# Altium PCB PCB2.PcbDoc
Units mm, origin at the board's own origin, x right, y up, seen from the top; angles counter-clockwise.
Board outline 98.69 x 51.22 mm, 2 copper layers (Top Layer, Bottom Layer); 19 components, 17 nets, 60 pads, 0 vias.
Unrouted connection lines stored in the file: 7.
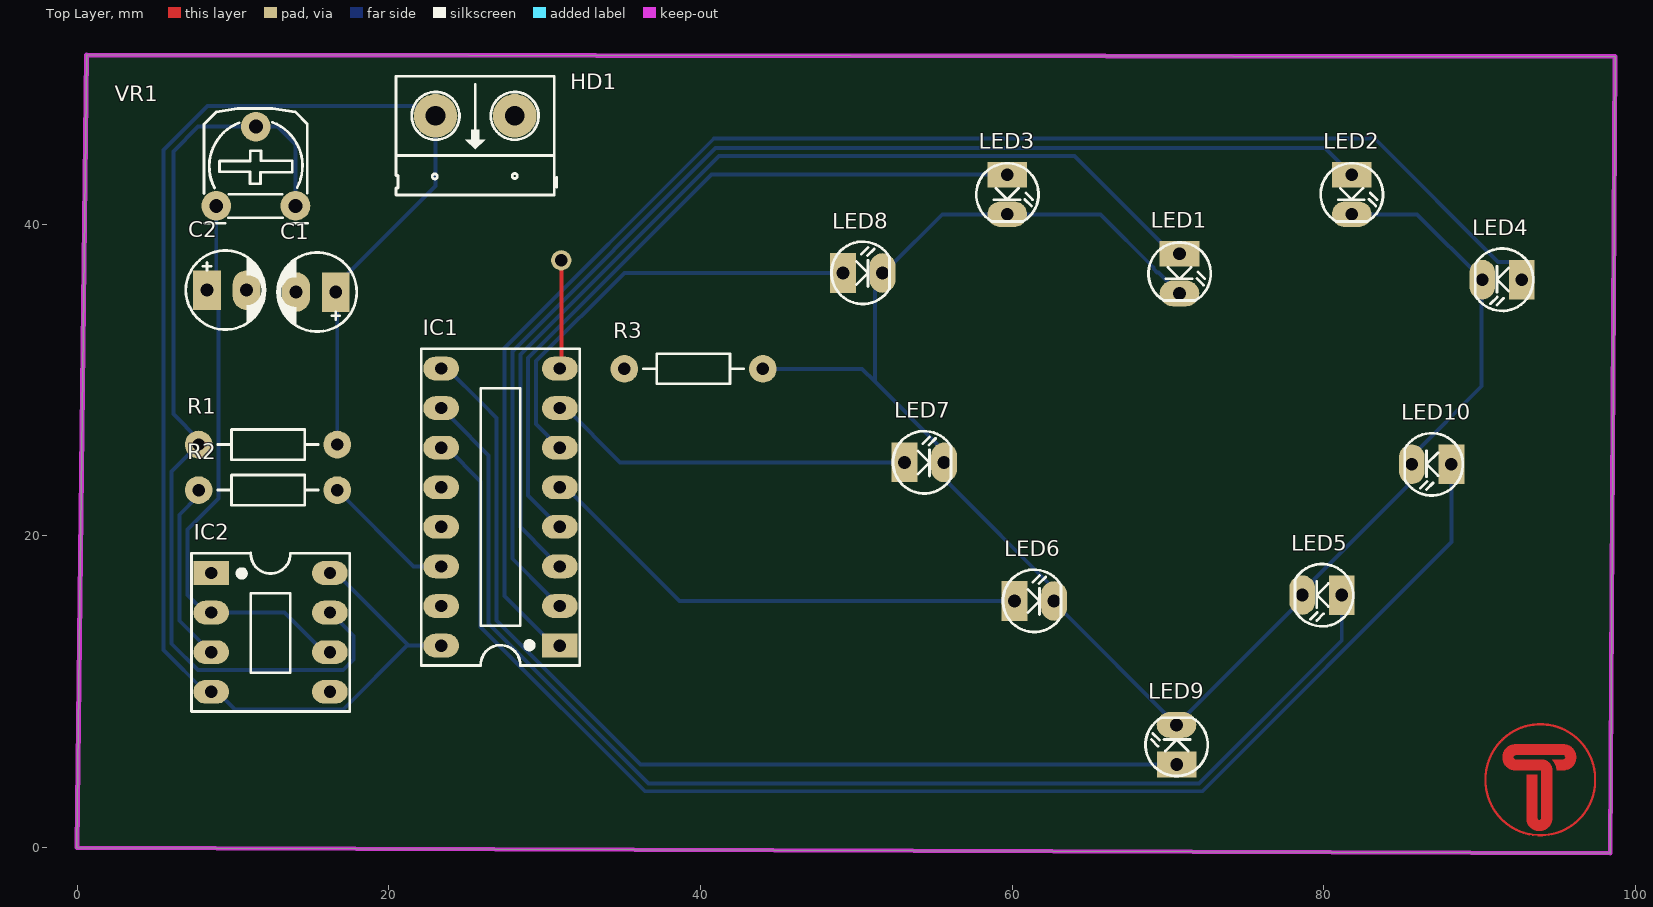
[diagram p0: Top Layer view]
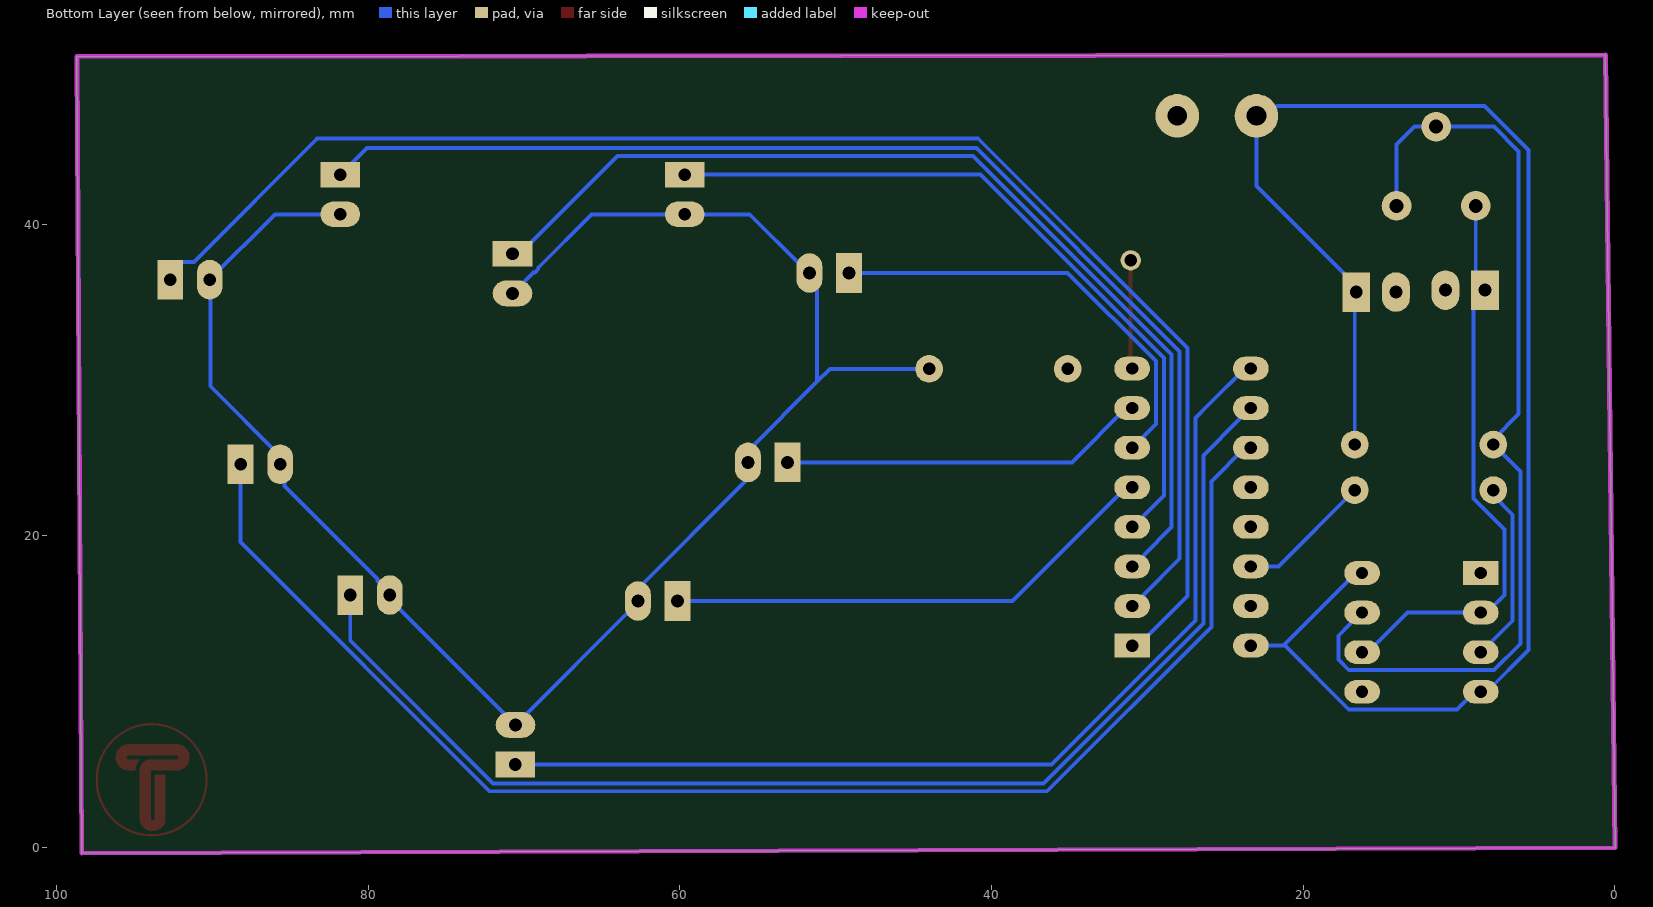
[diagram p1: Bottom Layer view, seen from below]
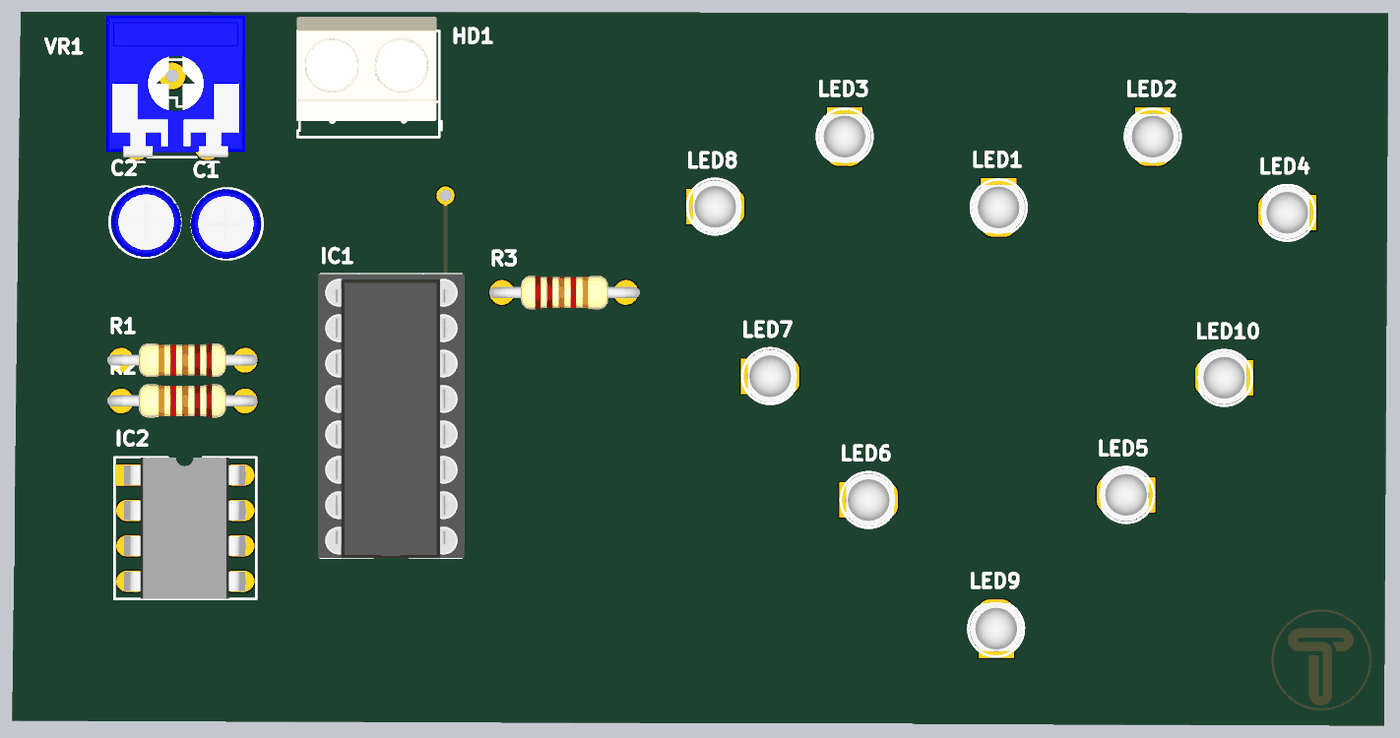
[diagram p2: 3D render of the assembled board from above, using the file's embedded part models]

## Layer stack, top to bottom
Top Solder: solder mask 0.0102, Solder Resist, Dk 3.5
Top Layer: signal copper 0.0356
Dielectric 1: dielectric 0.32, FR-4, Dk 4.8
Bottom Layer: signal copper 0.0356
Bottom Solder: solder mask 0.0102, Solder Resist, Dk 3.5

## Board outline
-0.002,-0.006 98.389,-0.357 98.686,50.762 0.608,50.861

## Design rules (kind name [scope] priority, off if disabled: settings)
Clearance [All] p1: gap=0.254 ignorepadtopadclearanceinfootprint=FALSE except(0: Arc-Hole Track-Hole SMDPad-Hole THPad-Hole Via-Hole Fill-Hole Poly-Hole Region-Hole Text-Hole)
PolygonConnect [All] p1: connectstyle=Relief reliefconductorwidth=0.254 reliefentries=4 polygonreliefangle="90 Angle" airgapwidth=0.254
RoutingVias [All] p1: holewidth=0.711 width=1.27 viastyle="Through Hole" minholewidth=0.711 minwidth=1.27 maxholewidth=0.711 maxwidth=1.27
SolderMaskExpansion [All] p1: expansion=0.102 istentingtop=FALSE
Width [All] p1: maxlimit=0.254 minlimit=0.254 preferedwidth=0.254
30 further rules are at their usual default settings.

## Classes and differential pairs
component class Sheet2: C1 C2 HD1 IC1 IC2 LED1 LED2 LED3 LED4 LED5 LED6 LED7 LED8 LED9 LED10 VR1

## Components (designator, comment, footprint, x,y, rotation, side; value= is the part's Value field where it differs from the comment)
C1 "1uF/50V" CP1/2 16.594,35.649 r180 top value=10uF/50V
C2 "1uF/50V" CP1/2 8.339,35.776 r0 top value=10uF/50V
HD1 "Header 2" HED2 28.087,46.958 r180 top
IC1 "4017" DIP16/W0.3 30.983,12.963 r90 top value=CD4017
IC2 "LM555" DIP8/W0.3 8.607,17.622 r270 top
LED1 "LED" LED-3#1 70.739,38.1 r270 top value="LED 3 ly Single Colour"
LED2 "LED" LED-3#1 81.788,43.18 r270 top value="LED 3 ly Single Colour"
LED3 "LED" LED-3#1 59.69,43.18 r270 top value="LED 3 ly Single Colour"
LED4 "LED" LED-3#1 92.71,36.449 r180 top value="LED 3 ly Single Colour"
LED5 "LED" LED-3#1 81.153,16.208 r180 top value="LED 3 ly Single Colour"
LED6 "LED" LED-3#1 60.149,15.829 r0 top value="LED 3 ly Single Colour"
LED7 "LED" LED-3#1 53.093,24.718 r0 top value="LED 3 ly Single Colour"
LED8 "LED" LED-3#1 49.145,36.875 r0 top value="LED 3 ly Single Colour"
LED9 "LED" LED-3#2 70.568,5.333 r90 top value="LED 3 ly Single Colour"
LED10 "LED" LED-3#1 88.188,24.605 r180 top value="LED 3 ly Single Colour"
R1 "10K, 1/4W" R1/4W 7.807,25.862 r0 top value="R1/4W - 1K"
R2 "10K, 1/4W" R1/4W 7.807,22.941 r0 top value="R1/4W - 1K"
R3 "1K5, 1/4W" R1/4W 44.007,30.726 r180 top value="R1/4W - 1K"
VR1 "100K" VR 8.934,41.183 r0 top value="VR 10K"

## Footprints (in the part's own frame and the unit in brackets; to place one, negate y for a bottom-side part, rotate by r counter-clockwise, add the part's x,y. Pads: shape width x height; smd on the part's side, far side on the other; paste and mask are expansions set on the pad)
CP1/2 [mil] "Tu hoa < 22uF/16>50V"
  rect 70x100 hole 32: 1(0,0)
  oval 70x100 hole 32: 2(100,0)
  silkscreen extent -53,-100 147,100, body extent -49,-99 149,99, height 287
DIP8/W0.3 [mil] "8 PIN, W 300mil, Pin to pin 100mil"
  rect 60x90 hole 31: 1(0,0)
  oval 60x90 hole 31: 2(100,0) 3(200,0) 4(300,0) 5(300,300) 6(200,300) 7(100,300) 8(0,300)
  silkscreen extent -50,-50 350,350, body extent -50,-40 350,336, height 201
DIP16/W0.3 [mil] "16 PIN, W 300mil, Pin to pin 100mil"
  rect 60x90 hole 31: 1(0,0)
  oval 60x90 hole 31: 2(100,0) 3(200,0) 4(300,0) 5(400,0) 6(500,0) 7(600,0) 8(700,0) 9(700,300) 10(600,300) 11(500,300) 12(400,300) 13(300,300) 14(200,300) 15(100,300) 16(0,300)
  silkscreen extent -50,-50 750,350, body extent -52,-57 752,356, height 299
HED2 [mil] "Header 2, 2 pin, hight 300mil, Pin to Pin 200, Colour Green"
  round 110 hole 50: 1(0,0) 2(200,0)
  silkscreen extent -106,-100 300,200, body extent -92,-140 302,155, height 394
LED-3#1 [mil] "LED 2 PIN, 3ly Only colour"
  rect 65x100 hole 32: 1(0,0)
  oval 65x100 hole 32: 2(100,0)
  silkscreen extent -29,-78 118,79, body extent -13,-75 125,75, height 217
LED-3#2 [mil] "LED 2 PIN, 3ly Only colour"
  rect 65x100 hole 32: 1(0,0)
  oval 65x100 hole 32: 2(100,0.69)
  silkscreen extent -29,-78 118,79, body extent -13,-75 125,75, height 217
R1/4W [mil] "R 1/4W, 2 Pin, 350mil"
  round 70 hole 31: 1(0,0) 2(350,0)
  silkscreen extent 48,-38 302,38, body extent -40,-47 386,47, height 111
VR [mil] "Resistor Variable"
  round 75 hole 35: 1(0,0) 2(100,200) 3(200,0)
  silkscreen extent -31,-44 231,246, body extent -87,-30 307,372, height 165

## Part data
C1 C2: library part CP1, "Cap P  0,1uF < 22uF , 16 - 50V", Description 1="10 => 220uF/6,3V/10V - 10uF => 100uF/16V", Description 2="0,1uF => 33uF/50V - 10uF => 22uF/63V", Description 3="0,47uF => 10uF/100V"
HD1: library part Hed2, "Header 2 (Green)"
IC1: "Decade Counter/Divider with 10 Decoded Outputs", Designed by=VanDungEvn
IC2: "Timer"
LED1 LED2 LED3 LED4 LED5 LED6 LED7 LED8 LED9 LED10: "LED Single colour Green and Red"
R1 R2 R3: library part R1/4W, "Resistor 1/4W"
VR1: library part VR1, "Var Resistor"

## Free pads (board coordinates)
  round 1.3 hole 0.8 mask+0.1: 2(31.073,37.685)

## Nets (pads, with @x,y where several pads share a name; then routed paths per layer and width w, separated by ;. In a path a pad name is that pad's centre, name@x,y a point inside that pad or via, vN(x,y) a via of type N, cw(c..) or ccw(c..) an arc to the next point about the centre after c; other vN are vias at no path point)
GND: C1.2 C2.2 HD1.1 IC1.8 IC1.13 IC1.15 IC2.1 pad.2 R3.2 | length 7
  Top Layer w0.254: IC1.8 31.073,30.833 pad.2
NetC2_1: C2.1 IC2.2 IC2.6 VR1.1 | length 37
  Bottom Layer w0.254: VR1.1 8.934,36.371 C2.1 9.077,35.039 9.077,22.415 7.083,20.422 7.083,16.225 8.226,15.082 IC2.2 13.306,15.082 15.846,12.542 IC2.6
NetIC1_1: IC1.1 LED4.1 | length 95.6
  Bottom Layer w0.254: IC1.1 30.602,12.963 27.427,16.138 27.427,32.058 40.857,45.488 83.282,45.488 91.178,37.592 92.011,37.592 92.71,36.893 LED4.1
NetIC1_2: IC1.2 LED2.1 | length 77.6
  Bottom Layer w0.254: IC1.2 30.945,15.503 30.231,16.217 30.231,16.241 27.935,18.537 27.935,31.848 40.982,44.895 80.073,44.895 LED2.1
NetIC1_3: IC1.3 LED1.1 | length 64.8
  Bottom Layer w0.254: IC1.3 30.945,18.043 30.231,18.757 30.231,18.781 28.443,20.569 28.443,31.637 41.192,44.386 64.008,44.386 70.294,38.1 LED1.1
NetIC1_4: IC1.4 LED3.1 | length 47.3
  Bottom Layer w0.254: IC1.4 30.945,20.583 30.231,21.297 30.231,21.321 28.951,22.601 28.951,31.427 40.704,43.18 LED3.1
NetIC1_5: IC1.5 LED6.1 | length 32.2
  Bottom Layer w0.254: IC1.5 31.364,23.123 38.658,15.829 LED6.1
NetIC1_6: IC1.6 LED8.1 | length 28.2
  Bottom Layer w0.254: IC1.6 30.945,25.663 30.231,26.377 30.231,26.401 29.459,27.173 29.459,31.216 35.117,36.875 LED8.1
NetIC1_7: IC1.7 LED7.1 | length 23.6
  Bottom Layer w0.254: IC1.7 31.364,28.203 34.849,24.718 LED7.1
NetIC1_9: IC1.9 LED9.1 | length 65.3
  Bottom Layer w0.254: IC1.9 23.744,30.743 26.068,28.419 26.919,27.568 26.919,14.583 36.169,5.333 LED9.1
NetIC1_10: IC1.10 LED5.1 | length 80.8
  Bottom Layer w0.254: IC1.10 23.4,28.203 24.114,27.489 24.114,27.465 26.411,25.169 26.411,14.373 36.657,4.126 71.995,4.126 81.153,13.284 LED5.1
NetIC1_11: IC1.11 LED10.1 | length 91.1
  Bottom Layer w0.254: IC1.11 23.744,25.663 25.903,23.504 25.903,14.162 36.447,3.618 72.206,3.618 88.188,19.601 LED10.1
NetIC1_14: IC1.14 R2.2 | length 8.7
  Bottom Layer w0.254: R2.2 21.595,18.043 IC1.14
NetIC2_3: IC2.3 R2.1 | length 11.8
  Bottom Layer w0.254: R2.1 7.807,22.591 6.575,21.36 6.575,14.56 7.506,13.629 8.594,12.542 IC2.3
NetIC2_7: IC2.7 R1.1 VR1.2 VR1.3 | length 62.2
  Bottom Layer w0.254: VR1.3 14.014,45.126 12.877,46.263 VR1.2 7.762,46.263 6.176,44.677 6.176,27.814 7.807,26.183 R1.1 6.067,24.123 6.067,13.085 7.753,11.399 17.082,11.399 17.751,12.069 17.751,13.595 16.991,14.356 16.265,15.082 IC2.7
NetLED1_2: LED1.2 LED2.2 LED3.2 LED4.2 LED5.2 LED6.2 LED7.2 LED8.2 LED9.2 LED10.2 R3.1 | length 113.6
  Bottom Layer w0.254: R3.1 50.372,30.726 51.199,29.898 ; 51.199,35.757 51.199,29.898 ; LED8.2@51.308,36.498 LED8.2 52.063,37.253 52.129,37.253 55.517,40.64 LED3.2 65.659,40.64 69.088,37.211 69.088,37.117 69.311,36.893 69.406,36.893 LED1.2 ; LED8.2@51.629,37.338 LED8.2@51.687,37.396 ; LED7.2@55.633,24.631 LED7.2 55.633,25.464 51.199,29.898 ; LED7.2@55.766,24.498 55.766,23.545 62.865,16.447 62.865,15.557 LED9.2 ; LED9.2@70.585,7.908 78.613,15.936 LED5.2 78.613,16.48 LED5.2@78.841,16.708 ; LED5.2@78.828,16.721 LED5.2@78.984,16.721 ; LED5.2@78.863,16.685 78.984,16.685 79.408,17.11 79.408,17.23 85.381,23.203 85.381,24.338 LED10.2 85.648,25.132 90.121,29.604 90.121,36.4 LED4.2 85.979,40.64 LED2.2
VCC: C1.1 HD1.2 IC1.16 IC2.4 IC2.8 R1.2 | length 102.8
  Bottom Layer w0.254: IC2.8 16.608,17.622 21.268,12.963 ; R1.2 16.697,35.547 C1.1 16.594,36.03 23.007,42.443 HD1.2 22.32,46.958 21.681,47.596 8.377,47.596 5.559,44.778 5.559,12.669 8.226,10.002 IC2.4 8.988,10.002 10.131,8.859 17.082,8.859 21.186,12.963 21.268,12.963 ; IC1.16 21.268,12.963
pads on no net: IC1.12 IC2.5

## Keep-outs
Keep-Out Layer:
  the board outline again, w0.3

## Other copper
Top Layer:
  region: 1391 vertices and 1 holes, not listed, extent 90.326,0.735 97.466,7.972
  region: 687 vertices and 0 holes, not listed, extent 91.48,1.075 96.191,6.624